# Altium PCB PCB2.PcbDoc
Units mm, origin at the board's own origin, x right, y up, seen from the top; angles counter-clockwise.
Board outline 45 x 45 mm, 2 copper layers (Top Layer, Bottom Layer); 38 components, 25 nets, 180 pads, 0 vias.
Unrouted connection lines stored in the file: 113.
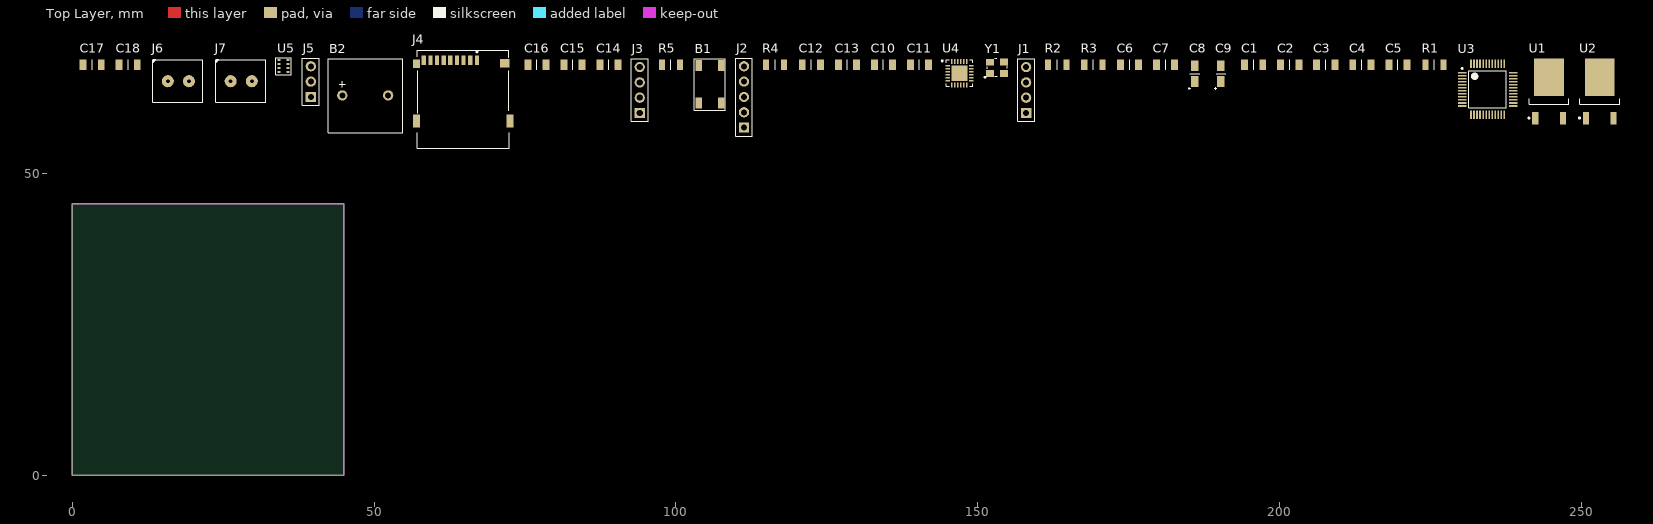
[diagram p0: Top Layer view]
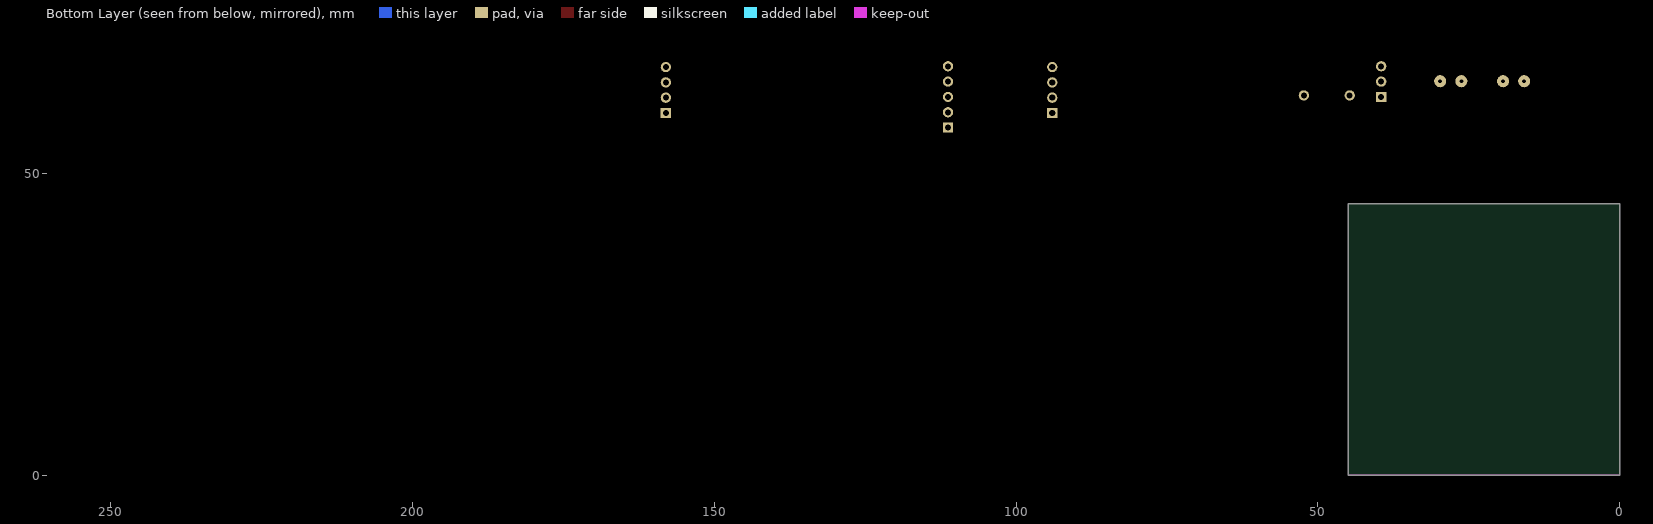
[diagram p1: Bottom Layer view, seen from below]

## Layer stack, top to bottom
Top Solder: solder mask 0.0102, Solder Resist, Dk 3.5
Top Layer: signal copper 0.0356
Dielectric 1: dielectric 0.32, FR-4, Dk 4.8
Bottom Layer: signal copper 0.0356
Bottom Solder: solder mask 0.0102, Solder Resist, Dk 3.5

## Board outline
0,0 45,0 45,45 0,45

## Design rules (kind name [scope] priority, off if disabled: settings)
Clearance [All] p1: gap=0.254 ignorepadtopadclearanceinfootprint=FALSE except(0: Arc-Hole Track-Hole SMDPad-Hole THPad-Hole Via-Hole Fill-Hole Poly-Hole Region-Hole Text-Hole)
PolygonConnect [All] p1: connectstyle=Relief reliefconductorwidth=0.254 reliefentries=4 polygonreliefangle="90 Angle" airgapwidth=0.254
RoomDefinition Sheet2 [InComponentClass('Sheet2')] p1: confinementstyle=ConfineIn formatcopy=TRUE lockcomponents=FALSE outline 0.782,51.872 256.814,51.872 256.814,71.938 0.782,71.938
RoutingVias [All] p1: holewidth=0.711 width=1.27 viastyle="Through Hole" minholewidth=0.711 minwidth=1.27 maxholewidth=0.711 maxwidth=1.27
SolderMaskExpansion [All] p1: expansion=0.102 istentingtop=FALSE
Width [All] p1: maxlimit=0.254 minlimit=0.254 preferedwidth=0.254
30 further rules are at their usual default settings.

## Components (designator, comment, footprint, x,y, rotation, side; value= is the part's Value field where it differs from the comment)
B1 "Push Button" "PUSB BUTTON-SMD" 103.779,61.651 r90 top
B2 "BUZZER 5v" "BUZZER 5v" 44.724,62.921 r0 top
C1 "0.1 uF" C1206 194.203,68.001 r0 top
C2 "0.1 uF" C1206 200.172,68.001 r0 top
C3 "0.1 uF" C1206 206.141,68.001 r0 top
C4 "0.1 uF" C1206 212.11,68.001 r0 top
C5 "0.1 uF" C1206 218.079,68.001 r0 top
C6 "330 nF C1206" C1206 173.629,68.001 r0 top
C7 "330 nF C1206" C1206 179.598,68.001 r0 top
C8 "10 uF TANTAL" "C1206 - TANTAL" 185.948,65.207 r90 top
C9 "10 uF TANTAL" "C1206 - TANTAL" 190.266,65.207 r90 top
C10 "16 pF" C1206 132.862,68.001 r0 top
C11 "16 pF" C1206 138.831,68.001 r0 top
C12 "0.1 uF" C1206 120.924,68.001 r0 top
C13 "0.1 uF" C1206 126.893,68.001 r0 top
C14 "0.1 uF C1206" C1206 87.396,68.001 r0 top
C15 "2.2 nF" C1206 81.427,68.001 r0 top
C16 "0.1 uF" C1206 75.458,68.001 r0 top
C17 "0.1 uF" C1206 1.798,68.001 r0 top
C18 "0.1 uF" C1206 7.767,68.001 r0 top
J1 "HEADER 2.54mm 1x4" "HEADER 2.54mm 1x4" 158.008,60 r90 top
J2 "HEADER 2.54mm 1x5" "HEADER 2.54mm 1x5" 111.272,57.587 r90 top
J3 "HEADER 2.54mm 1x4" "HEADER 2.54mm 1x4" 94,60 r90 top
J4 "MICRO SD CARD HOLDER" "MICRO SD CARD HOLDER" 56.09,53.697 r0 top
J5 "HEADER 2.54mm 1x3" "HEADER 2.54mm 1x3" 39.517,62.667 r90 top
J6 "KLEMENS 1x2 - 3.5mm" "KLEMENS 1x2 - 3.5mm" 12.974,61.397 r0 top
J7 "KLEMENS 1x2 - 3.5mm" "KLEMENS 1x2 - 3.5mm" 23.388,61.397 r0 top
R1 "10k R1206" "R1206 RESISTOR" 224.175,68.001 r0 top
R2 "4.7k" "R1206 RESISTOR" 161.691,68.001 r0 top
R3 "4.7k" "R1206 RESISTOR" 167.66,68.001 r0 top
R4 "10k" "R1206 RESISTOR" 114.955,68.001 r0 top
R5 "10k R1206" "R1206 RESISTOR" 97.683,68.001 r0 top
U1 "L7805-DPAK" DPAK228P972X240-3N 244.622,63.556 r90 top
U2 "LD108633-DPAK" DPAK228P972X240-3N 253.004,63.556 r90 top
U3 "STM32F101" LQPF48_STM 234.462,63.937 r0 top
U4 "MPU6050" QFN50P400X400X95_HS-25N 146.959,66.604 r0 top
U5 "BMP280" BMP280 35.707,68.763 r0 top
Y1 "8 MHz 12.5 pf Osc" "8 MHZ Osc." 153.182,67.493 r0 top

## Footprints (in the part's own frame and the unit in brackets; to place one, negate y for a bottom-side part, rotate by r counter-clockwise, add the part's x,y. Pads: shape width x height; smd on the part's side, far side on the other; paste and mask are expansions set on the pad)
"8 MHZ Osc." [mm]
  rect 1.3x1.1 smd mask+0.05: 1(-1.148,-0.954) 2(1.152,-0.954) 3(1.137,0.954) 4(-1.152,0.937)
  silkscreen extent -2.08,-1.65 1.72,1.55, body extent -1.6,-1.25 1.6,1.25, height 1.22
BMP280 [mm]
  rect 0.5x0.35 smd mask+0.05: 1(0,0) 2(0.005,-0.652) 3(0.005,-1.302) 4(0.005,-1.952) 5(-1.45,-1.95) 6(-1.45,-1.3) 7(-1.45,-0.65) 8(-1.45,0)
  silkscreen extent -2,-2.4 0.6,0.4, body extent -1.72,-2.23 0.5,0.3, height 0.95
"BUZZER 5v" [mm]
  round 1.7 hole 1: 1(0,0) 2(7.6,0)
  silkscreen extent -2.3,-6.2 10,6.1, body extent -2.18,-6.02 9.82,5.98, height 9.5
C1206 [mm]
  rect 1.15x1.8 smd mask+0.05: 1(0,0) 2(3,0)
  silkscreen extent 1.5,-0.8 1.5,0.8, body extent -0.1,-0.8 3.1,0.8, height 1
"C1206 - TANTAL" [mm]
  rect 1.8x1.23 smd mask+0.05: 1(0,0) 1(0,0) 2(2.62,0)
  silkscreen extent -1.34,-0.8 1.3,1.1, body extent -0.3,-0.8 2.9,0.8, height 1.62
DPAK228P972X240-3N [mm] "D-PAK, 3-Pads, Body 6.20x6.66mm (max), IPC Medium Density"
  rect 2.1x1 smd mask+0.05: 1(-4.4,2.28) 2(-4.4,-2.28)
  rect 6.2x4.9 smd mask+0.05: 3(2.35,0)
  silkscreen extent -4.52,-3.3 -1.15,3.45, body extent -4.22,-3.3 5.5,3.3, height 3.3
"HEADER 2.54mm 1x3" [mm]
  rect 1.7x1.7 hole 1: 1(0,0)
  round 1.7 hole 1: 2(2.54,0) 3(5.08,0)
  silkscreen extent -1.4,-1.4 6.4,1.4, body extent -1.3,-1.25 6.32,1.25, height 8.6
"HEADER 2.54mm 1x4" [mm]
  rect 1.7x1.7 hole 1: 1(0,0)
  round 1.7 hole 1: 2(2.54,0) 3(5.08,0) 4(7.62,0)
  silkscreen extent -1.4,-1.4 9,1.4, body extent -1.3,-1.23 8.86,1.27, height 8.6
"HEADER 2.54mm 1x5" [mm]
  rect 1.7x1.7 hole 1: 1(0,0)
  round 1.7 hole 1: 2(2.54,0) 3(5.08,0) 4(7.62,0) 5(10.16,0)
  silkscreen extent -1.4,-1.4 11.5,1.4, body extent -1.3,-1.25 11.4,1.25, height 8.6
"KLEMENS 1x2 - 3.5mm" [mm]
  round 2 hole 0.65: 1(2.85,3.875) 2(6.35,3.875)
  silkscreen extent 0.34,0.35 8.65,7.5, body extent 0.55,0.48 8.54,7.48, height 8.9
LQPF48_STM [mm] "TSQFP, 48-Leads, Body 7.00x7.00mm, Pitch 0.50mm, IPC Medium Density"
  rect 1.45x0.3 smd mask+0.05: 1(-4.225,2.75) 2(-4.225,2.25) 3(-4.225,1.75) 4(-4.225,1.25) 5(-4.225,0.75) 6(-4.225,0.25) 7(-4.225,-0.25) 8(-4.225,-0.75) 9(-4.225,-1.25) 10(-4.225,-1.75) 11(-4.225,-2.25) 12(-4.225,-2.75) 25(4.225,-2.75) 26(4.225,-2.25) 27(4.225,-1.75) 28(4.225,-1.25) 29(4.225,-0.75) 30(4.225,-0.25) 31(4.225,0.25) 32(4.225,0.75) 33(4.225,1.25) 34(4.225,1.75) 35(4.225,2.25) 36(4.225,2.75)
  rect 0.3x1.45 smd mask+0.05: 13(-2.75,-4.225) 14(-2.25,-4.225) 15(-1.75,-4.225) 16(-1.25,-4.225) 17(-0.75,-4.225) 18(-0.25,-4.225) 19(0.25,-4.225) 20(0.75,-4.225) 21(1.25,-4.225) 22(1.75,-4.225) 23(2.25,-4.225) 24(2.75,-4.225) 37(2.75,4.225) 38(2.25,4.225) 39(1.75,4.225) 40(1.25,4.225) 41(0.75,4.225) 42(0.25,4.225) 43(-0.25,4.225) 44(-0.75,4.225) 45(-1.25,4.225) 46(-1.75,4.225) 47(-2.25,4.225) 48(-2.75,4.225)
  silkscreen extent -4.35,-3.1 3.1,3.57, body extent -4.5,-4.53 4.5,4.47, height 1.6
"MICRO SD CARD HOLDER" [mm]
  rect 0.7x1.6 smd paste+0 mask+0: 1(10.934,15.075) 2(9.834,15.075) 3(8.734,15.075) 4(7.634,15.075) 5(6.534,15.075) 6(5.434,15.075) 7(4.334,15.075) 8(3.234,15.075) Cd(2.134,15.075)
  rect 1.2x1.4 smd paste+0 mask+0: 10(0.934,14.475)
  rect 1.6x1.4 smd paste+0 mask+0: 11(15.534,14.575)
  rect 1.2x2.2 smd paste+0 mask+0: 12(0.934,4.975) 13(16.434,4.975)
  round 0 hole 0.9 unplated paste-1000 mask+0: ""(3.734,4.575) ""(11.734,4.575)
  silkscreen extent 1.03,0.45 16.33,16.7, body extent 0.68,0.58 16.68,15.83, height 1.85
"PUSB BUTTON-SMD" [mm]
  rect 1.8x1.1 smd mask+0.05: 1(0,0) 2(6.2,0) 3(0,-3.7) 4(6.2,-3.7)
  silkscreen extent -1.15,-4.4 7.35,0.75, body extent -0.2,-4.5 6.2,0.7, height 1.5
QFN50P400X400X95_HS-25N [mm] "QFN, 24-Leads, Body 4.00x4.00mm, Pitch 0.50mm, Thermal Pad 2.70x2.60mm, IPC Medium Density"
  rect 0.8x0.25 smd paste+0 mask+0.05: 1(-1.95,1.25)
  rect 0.8x0.25 smd mask+0.05: 2(-1.95,0.75) 3(-1.95,0.25) 4(-1.95,-0.25) 5(-1.95,-0.75) 6(-1.95,-1.25) 13(1.95,-1.25) 14(1.95,-0.75) 15(1.95,-0.25) 16(1.95,0.25) 17(1.95,0.75) 18(1.95,1.25)
  rect 0.25x0.8 smd mask+0.05: 7(-1.25,-1.95) 8(-0.75,-1.95) 9(-0.25,-1.95) 10(0.25,-1.95) 11(0.75,-1.95) 12(1.25,-1.95) 19(1.25,1.95) 20(0.75,1.95) 21(0.25,1.95) 22(-0.25,1.95) 23(-0.75,1.95) 24(-1.25,1.95)
  rect 2.7x2.6 smd mask+0.05: 25(0,0)
  silkscreen extent -2.97,-2.2 2.2,2.2, body extent -2.06,-2.06 2.06,2.06, height 0.95
"R1206 RESISTOR" [mm]
  rect 1x1.8 smd mask+0.05: 1(-0.025,0) 2(2.975,0)
  silkscreen extent 1.48,-0.8 1.48,0.81, body extent -0.12,-0.8 3.08,0.81, height 0.55

## Part data
B1: "Smd Push Button", Satın Alma Linki=https://urun.n11.com/diger/mini-pushbutton-switch-smd-P227461537?gclid=Cj0KCQjwkoDmBRCcARIsAG3xzl8Y_-jeD7HocNM6lvuZ_rVp83568XPGtNzlPwXWLph8oCRqo0yh87UaApZYEALw_wcB&gclsrc=aw.ds
C1 C2 C3 C4 C5 C12 C13 C16 C17 C18: library part "0.1 uF C1206", "0.1 uF C1206"
C8 C9: "10 uF C1206 - TANTAL"
C15: "2.2 nF C1206"
J4: "MICRO SD CARD HOLDER KLS1-TF-003 Micro SD Card Connector"
R2 R3: "4.7k R1206"
R4: "10k R1206"
U1: "L7805 5V REGULATOR SMD PACKET"
U2: "LD108633 3.3V REGULATOR DPAK"
U3: "STM32F101 48PIN MICROPROCESSOR"
U4: "MPU GYRO"
U5: "BMP280 PRESSURE"

## Nets (pads, with @x,y where several pads share a name; then routed paths per layer and width w, separated by ;. In a path a pad name is that pad's centre, name@x,y a point inside that pad or via, vN(x,y) a via of type N, cw(c..) or ccw(c..) an arc to the next point about the centre after c; other vN are vias at no path point)
3.3V: C1.1 C2.1 C3.1 C4.1 C5.1 C9.1 C12.1 C13.1 C17.1 C18.1 J2.1 J3.1 J4.4 R2.2 R3.2 R4.1 R5.2 U2.3 U3.1 U3.9 U3.24 U3.36 U3.48 U4.8 U4.13 U5.6 U5.8
5V: C7.1 J1.1 J5.2 J7.2 U1.2
7.4V: C6.1 C8.1 J6.2 U1.1 U2.2
GND: B1.1 B1.2 B2.2 C1.2 C2.2 C3.2 C4.2 C5.2 C6.2 C7.2 C8.2 C9.2 C10.2 C11.2 C12.2 C13.2 C14.2 C15.2 C16.2 C17.2 C18.2 J1.2 J2.3 J3.2 J4.6 J4.10 J4.11 J4.12 J4.13 J5.3 J6.1 J7.1 R1.2 R4.2 U1.3 U2.1 U3.8 U3.23 U3.35 U3.47 U4.1 U4.9 U4.11 U4.18 U5.1 U5.7 Y1.2 Y1.4
NetB1_3: B1.3 B1.4 C14.1 J2.5 R5.1 U3.7
NetB2_1: B2.1 U3.32
NetC10_1: C10.1 U3.5 Y1.1
NetC11_1: C11.1 U3.6 Y1.3
NetC15_1: C15.1 U4.20
NetC16_1: C16.1 U4.10
NetJ1_3: J1.3 U3.12
NetJ1_4: J1.4 U3.13
NetJ2_2: J2.2 U3.37
NetJ2_4: J2.4 U3.34
NetJ3_3: J3.3 U3.30
NetJ3_4: J3.4 U3.31
NetJ4_2: J4.2 U3.11
NetJ4_3: J4.3 U3.17 U5.3
NetJ4_5: J4.5 U3.15 U5.4
NetJ4_7: J4.7 U3.16 U5.5
NetJ5_1: J5.1 U3.27
NetR1_1: R1.1 U3.44
NetR2_1: R2.1 U3.21 U4.23
NetR3_1: R3.1 U3.22 U4.24
NetU3_14: U3.14 U5.2
pads on no net: J4. J4.1 J4.8 J4.Cd U3.2 U3.3 U3.4 U3.10 U3.18 U3.19 U3.20 U3.25 U3.26 U3.28 U3.29 U3.33 U3.38 U3.39 U3.40 U3.41 U3.42 U3.43 U3.45 U3.46 U4.2 U4.3 U4.4 U4.5 U4.6 U4.7 U4.12 U4.14 U4.15 U4.16 U4.17 U4.19 U4.21 U4.22 U4.25

## Keep-outs
Keep-Out Layer:
  the board outline again, w0.1